# Altium PCB PCB_Aquecedor.PcbDoc
Units mm, origin at the board's own origin, x right, y up, seen from the top; angles counter-clockwise.
Board outline 115 x 87.5 mm, 2 copper layers (Top Layer, Bottom Layer); 32 components, 26 nets, 136 pads, 3 vias.
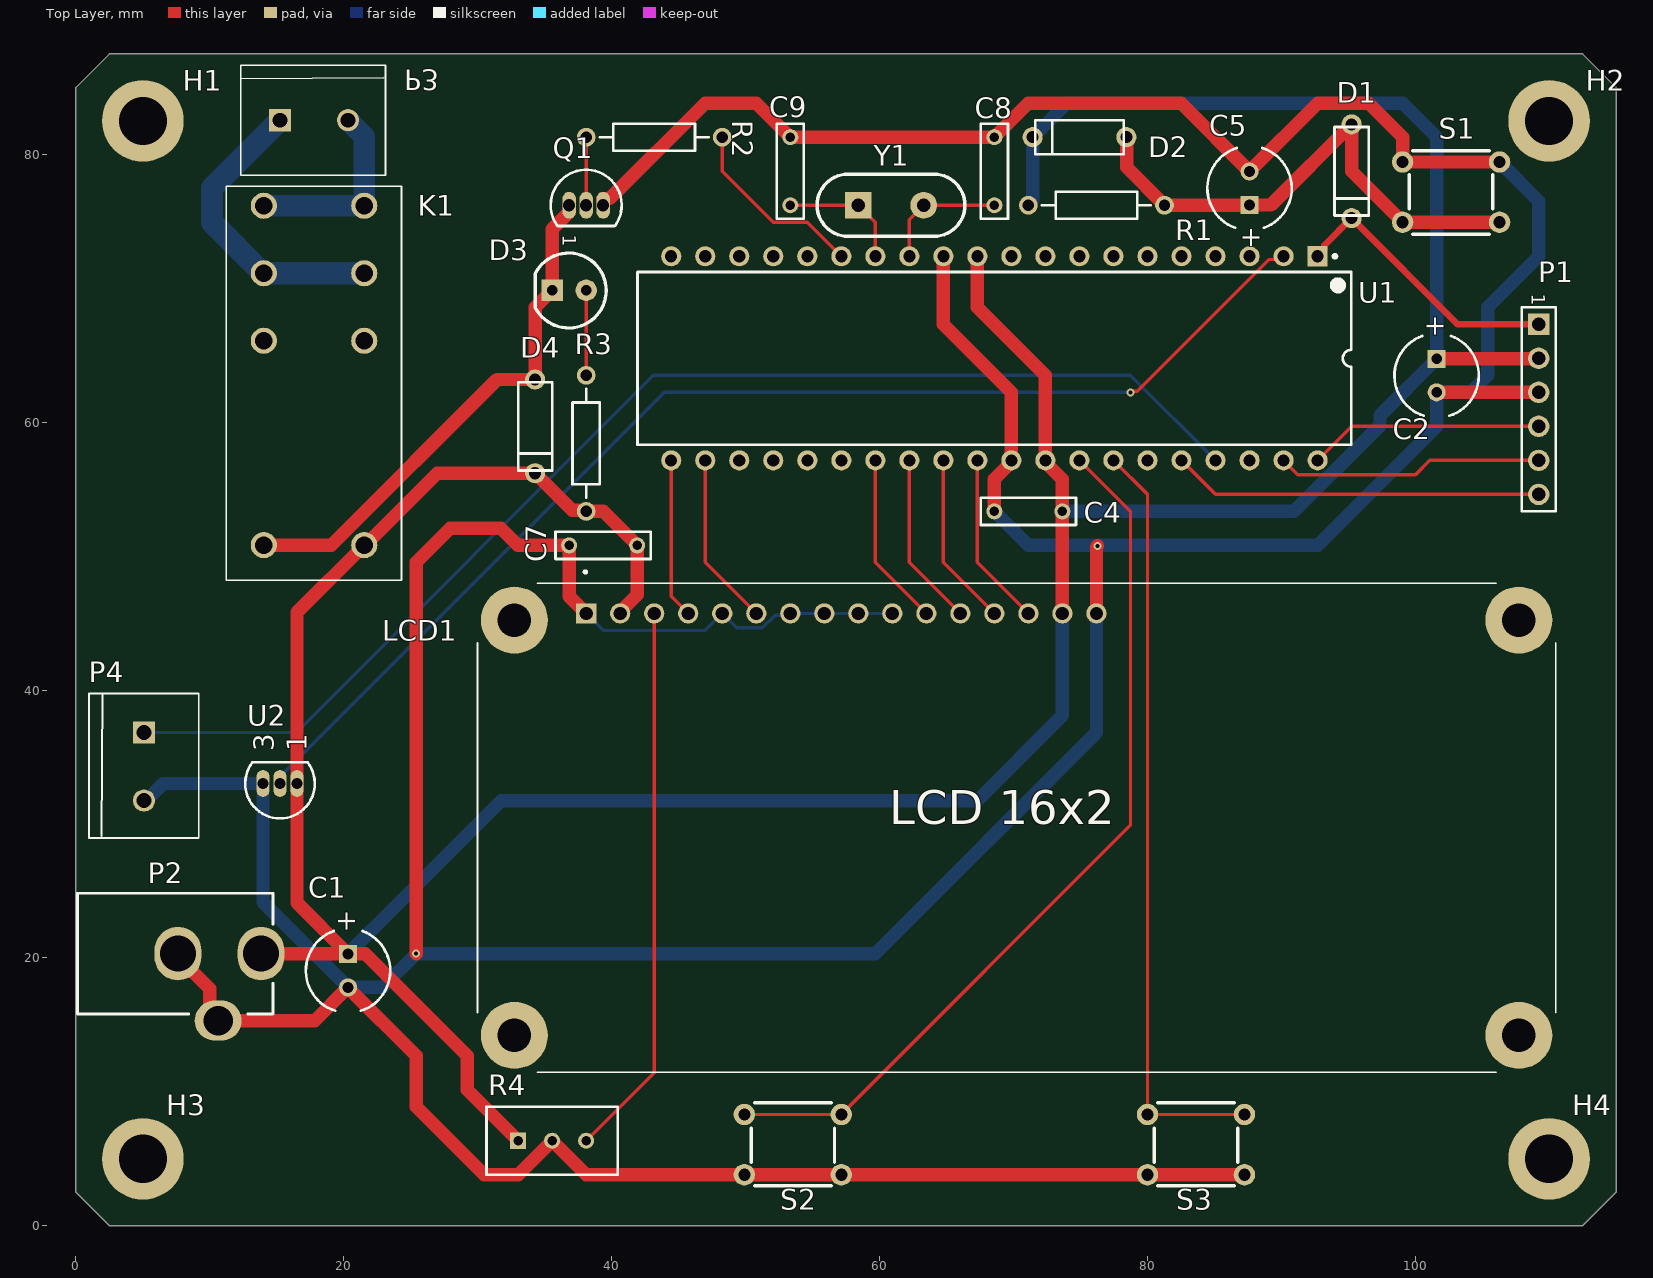
[diagram p0: Top Layer view]
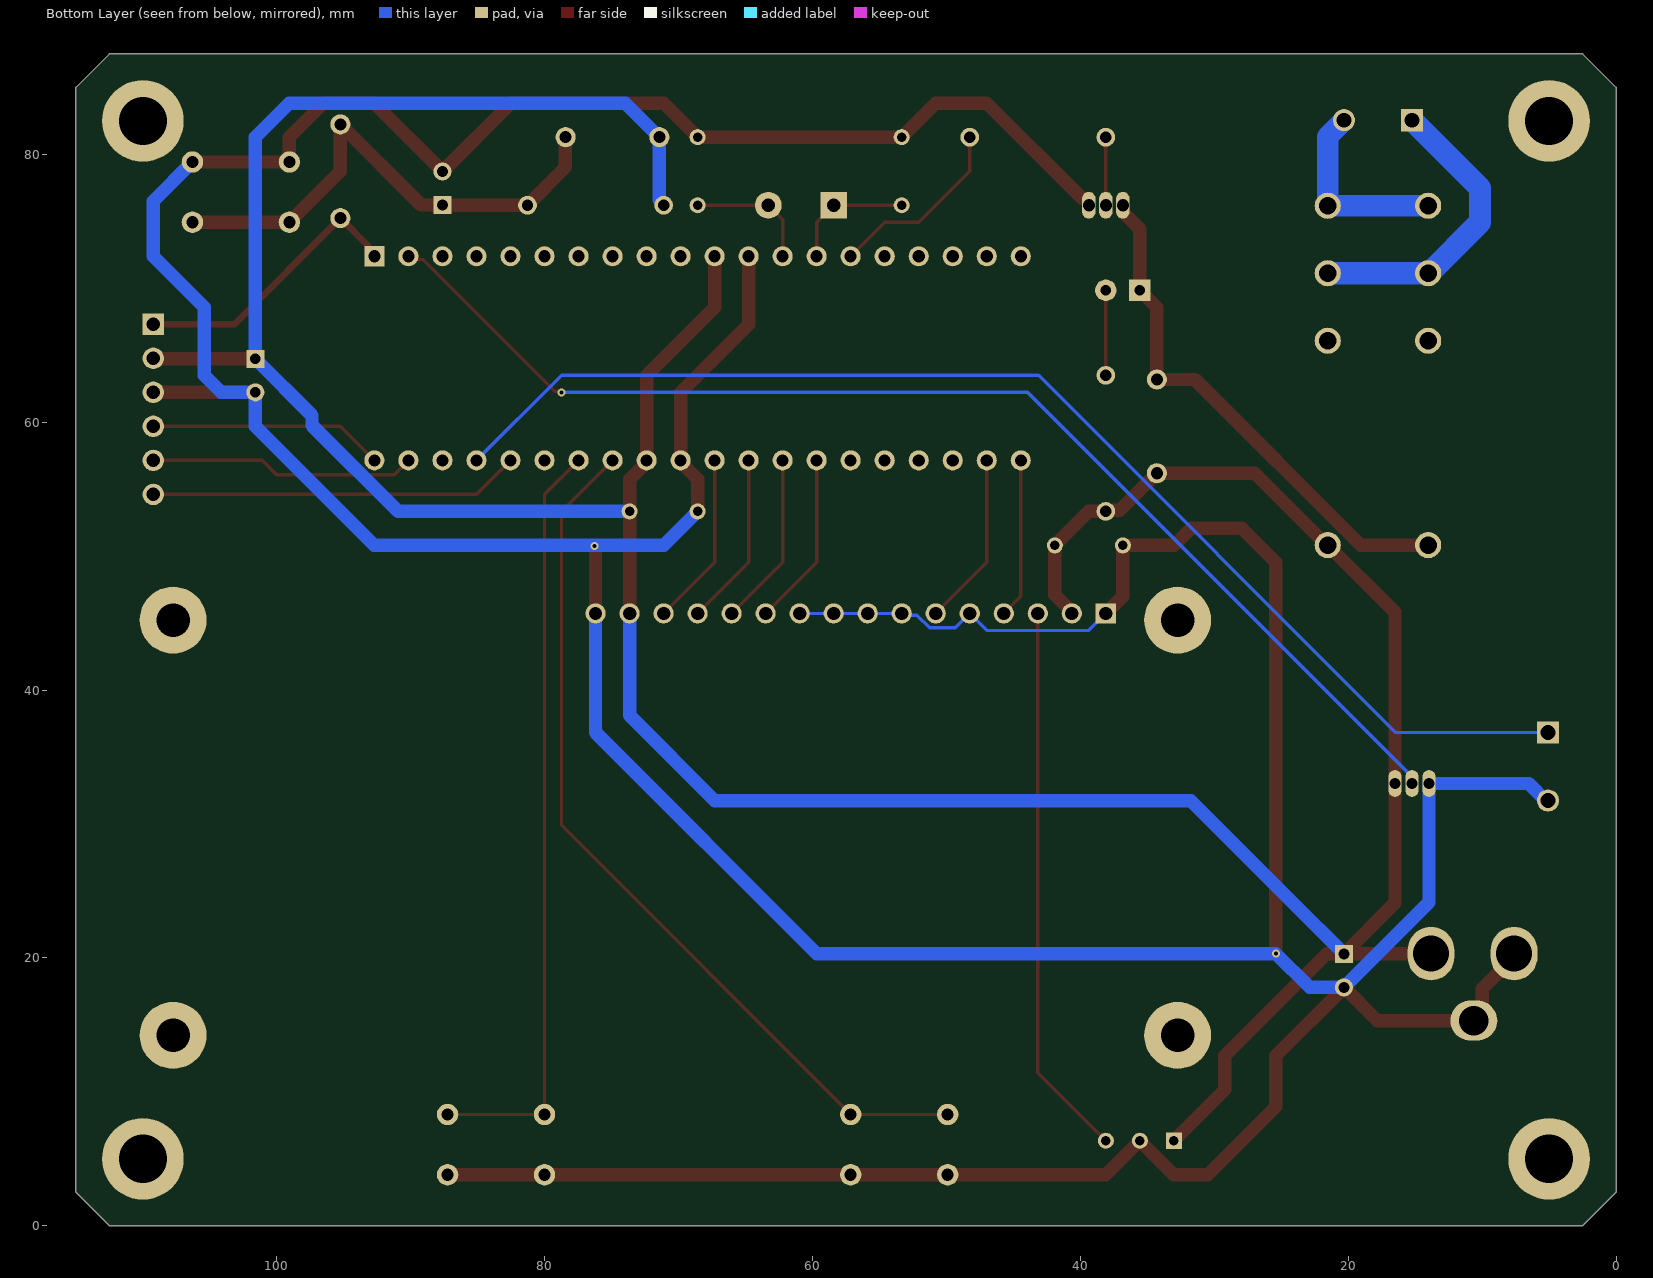
[diagram p1: Bottom Layer view, seen from below]
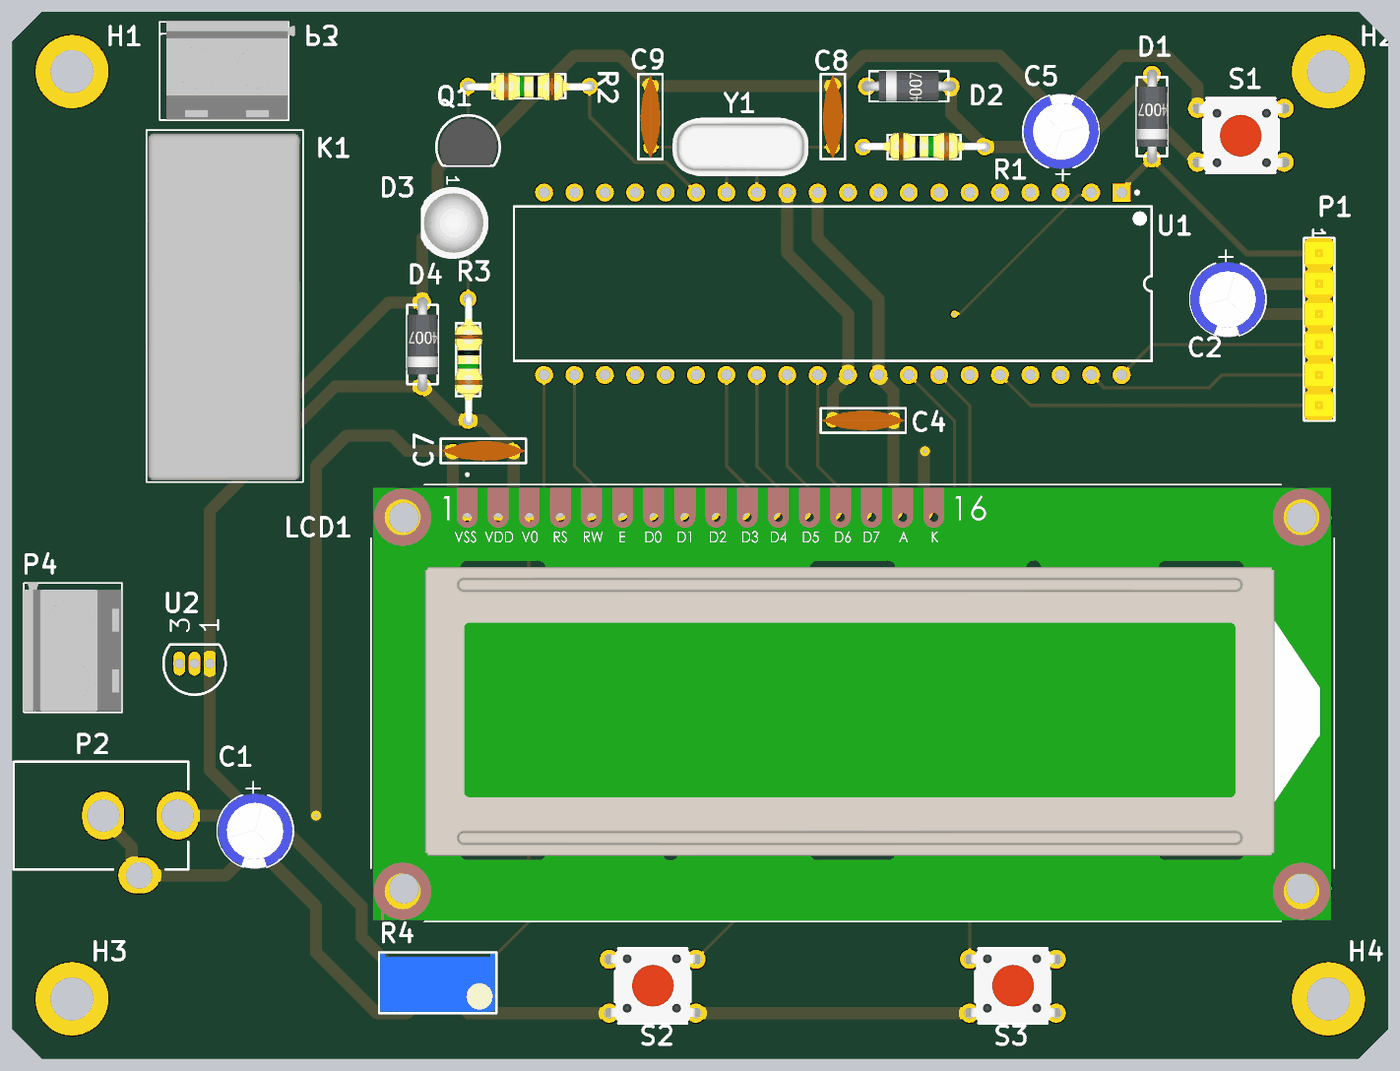
[diagram p2: 3D render of the assembled board from above, using the file's embedded part models]

## Layer stack, top to bottom
Top Solder: solder mask 0.0102, Solder Resist, Dk 3.5
Top Layer: signal copper 0.0356
Dielectric 1: dielectric 0.32, FR-4, Dk 4.8
Bottom Layer: signal copper 0.0356
Bottom Solder: solder mask 0.0102, Solder Resist, Dk 3.5

## Board outline
0,2.5 0,85 2.5,87.5 112.5,87.5 115,85 115,2.5 112.5,0 2.5,0

## Design rules (kind name [scope] priority, off if disabled: settings)
Clearance [All] p1: gap=0.2 ignorepadtopadclearanceinfootprint=FALSE
PolygonConnect [All] p1: connectstyle=Relief reliefconductorwidth=0.254 reliefentries=4 polygonreliefangle="90 Angle" airgapwidth=0.254
RoutingVias [All] p1: holewidth=0.305 width=0.61 viastyle="Through Hole" minholewidth=0.203 minwidth=0.406 maxholewidth=0.508 maxwidth=1.016
SolderMaskExpansion [All] p1: expansion=0.102 istentingtop=FALSE
Width default [InNetClass('other')] p1: maxlimit=0.254 minlimit=0.254 preferedwidth=0.254
Width AC [InNetClass('rele 220AC')] p2: maxlimit=1.7 minlimit=1.6 preferedwidth=1.676
Width power [InNetClass('Power Net')] p3: maxlimit=1 minlimit=0.254 preferedwidth=0.5
30 further rules are at their usual default settings.

## Classes and differential pairs
net class other: BT_AJUSTE BT_SELECT LCD_D4 LCD_D5 LCD_D6 LCD_D7 LCD_E LCD_RS NetC8_2 NetC9_2 NetD3_1 NetLCD1_3 NetQ1_2 NIVEL_CRITICO PGC PGD PGM RELE TMP_SENSOR
net class "rele 220AC": NetK1_1 NetK1_4
net class "Power Net": +5VD \M\C\L\R/VPP GND NetC5_1 NetD3_2
component class Sheet1: C2 C4 C5 C7 C8 C9 D1 D2 P1 P2 P3 P4 R1 R4 S1 S2 S3 Y1

## Components (designator, comment, footprint, x,y, rotation, side; value= is the part's Value field where it differs from the comment)
C1 "10uF 10V" CAPPR5-6.3x11 20.32,19.05 r270 top
C2 "10uF 10V" CAPPR5-6.3x11 101.6,63.48 r270 top
C4 "0.1 uF" RAD-0.2 71.12,53.34 r0 top value=1
C5 "10uF 10V" CAPPR5-6.3x11 87.63,77.47 r90 top
C7 "0.1 uF" RAD-0.2 39.37,50.8 r0 top value=1
C8 "15pF" RAD-0.2 68.58,78.74 r270 top value=1
C9 "15pF" RAD-0.2 53.34,78.74 r270 top value=1
D1 "1n4148" DIODE-1N400X 95.25,78.74 r270 top
D2 "1n4148" DIODE-1N400X 74.93,81.28 r180 top
D3 "LED" LED_5MM_GREEN 38.1,69.85 r180 top
D4 "Diode" DIODE-1N400X 34.29,59.69 r270 top
H1 "Hole" HOLE_M3 5,82.5 r0 top
H2 "Hole" HOLE_M3 110,82.5 r0 top
H3 "Hole" HOLE_M3 5,5 r0 top
H4 "Hole" HOLE_M3 110,5 r0 top
K1 "Relay" RELAY_RTD14005 17.78,63.5 r90 top
LCD1 "LCD 1602A" LCD_RC1602B-BIW-CSV 70.24,29.72 r0 top
P1 "Header 6" HDR1X6m 109.22,67.31 r270 top
P2 "Barrel Jack" BARREL2.5 0.12,20.32 r0 top
P3 "Header 2" "conector rele" 17.78,82.55 r0 top
P4 "Header 2" "conector rele" 5.08,34.29 r270 top
Q1 "bc546ata" TO-92 38.1,76.2 r270 top
R1 "10K" AXIAL-0.4 76.2,76.2 r180 top value=0
R2 "500" AXIAL-0.4 43.18,81.28 r0 top value=0
R3 "300" AXIAL-0.4 38.1,58.42 r90 top value=0
R4 "10k" VR1 35.56,6.35 r0 top
S1 "SW-PB" PB-SW 106.172,74.93 r180 top
S2 "SW-PB" PB-SW 50.038,8.31 r0 top
S3 "SW-PB" PB-SW 80.137,8.31 r0 top
U1 "PIC16F877-04/P" MCHP-PDIP-P40 68.58,64.77 r270 top
U2 "TMP36GT9Z" ADI-T-3 15.24,33.02 r90 top
Y1 "Crystal 4 MHz" CRYSTAL-HC49S 58.42,76.2 r90 top

## Footprints (in the part's own frame and the unit in brackets; to place one, negate y for a bottom-side part, rotate by r counter-clockwise, add the part's x,y. Pads: shape width x height; smd on the part's side, far side on the other; paste and mask are expansions set on the pad)
ADI-T-3 [mm] "TO, Flat Index; 3 In-Line, Axial Leads; Body Dia. 5.1mm; Leads 0.48 x 0.48 mm (max)"
  oval 2x1 hole 0.8: 1(0,-1.27) 2(0,0) 3(0,1.27)
  silkscreen extent -2.6,-2.6 1.6,2.6, body extent -2.6,-2.61 1.6,2.61, height 5.33
AXIAL-0.4 [mm]
  round 1.4 hole 0.85: 1(-5.08,0) 2(5.08,0)
  silkscreen extent -4.06,-1.02 4.06,1.02, body extent -5.38,-1.2 5.38,1.11, height 2.85
BARREL2.5 [mm] "DC Power Jack, 2.5mm, KLD Series, PCB Mount"
  oval 3.5x4 hole 2.7: 1(13.7,0) 2(7.5,0)
  oval 3.5x3 hole 2.2: 3(10.5,-5)
  silkscreen extent 0,-4.5 14.6,4.5, body extent 0,-4.45 14.54,4.56, height 11
CAPPR5-6.3x11 [mm] "Capacitor, Electrolytic, Radial; Body 6.3 x 11 mm (Dia.xH typ)"
  rect 1.35x1.35 hole 0.8: 1(-1.25,0)
  round 1.35 hole 0.8: 2(1.25,0)
  silkscreen extent -2.96,-3.15 3,3.15, body extent -3.12,-3.17 3.17,3.12, height 11.2
"conector rele" [mm]
  rect 1.65x1.65 hole 1.1: 1(-2.54,0)
  round 1.65 hole 1.1: 2(2.54,0)
  silkscreen extent -5.46,-4.1 5.33,4.1, body extent -4.91,-4.06 5.85,4.14, height 10
CRYSTAL-HC49S [mm]
  rect 2x2 hole 1: 1(0,0)
  round 2 hole 1: 2(0,-4.88)
  silkscreen extent -2.32,-7.96 2.32,3.08, body extent -2.34,-8.12 2.31,3.23, height 3.52
DIODE-1N400X [mm]
  round 1.5 hole 0.9: 1(-3.5,0) 2(3.5,0)
  silkscreen extent -3.3,-1.27 3.3,1.27, body extent -3.9,-1.31 3.9,1.31, height 2.81
HDR1X6m [mm] "Connector; Header; 6 Position"
  rect 1.6x1.6 hole 1: 1(0,0)
  round 1.6 hole 1: 2(2.54,0) 3(5.08,0) 4(7.62,0) 5(10.16,0) 6(12.7,0)
  silkscreen extent -1.27,-1.27 13.97,1.27, body extent -1.27,-1.27 13.97,1.27, height 9.55
HOLE_M3 [mm]
  round 6.1 hole 3.6: 1(0,0)
LCD_RC1602B-BIW-CSV [mm]
  rect 1.508x1.508 hole 1: 1(-32.14,16)
  round 1.508 hole 1: 2(-29.6,16) 3(-27.06,16) 4(-24.52,16) 5(-21.98,16) 6(-19.44,16) 7(-16.9,16) 8(-14.36,16) 9(-11.82,16) 10(-9.28,16) 11(-6.74,16) 12(-4.2,16) 13(-1.66,16) 14(0.88,16) 15(3.42,16) 16(5.96,16)
  round 5 hole 2.5: S1(-37.5,15.5) S2(37.5,15.5) S3(37.5,-15.5) S4(-37.5,-15.5)
  silkscreen extent -40.25,-18.25 40.25,19.2, body extent -40.06,-18.18 39.96,17.98, height 11.4
LED_5MM_GREEN [mm] "Led 5 mm"
  round 1.6 hole 0.8: 1(0,0)
  rect 1.6x1.6 hole 0.8: 2(2.54,0)
  silkscreen extent -1.49,-2.78 3.81,2.82, body extent -1.71,-3.01 3.71,3.01, height 8.81
MCHP-PDIP-P40 [mm] "PDIP, 40-Leads, Body 51.75x13.53mm, Pitch 2.54mm"
  rect 1.5x1.5 hole 0.9: 1(-7.62,24.13)
  round 1.5 hole 0.9: 2(-7.62,21.59) 3(-7.62,19.05) 4(-7.62,16.51) 5(-7.62,13.97) 6(-7.62,11.43) 7(-7.62,8.89) 8(-7.62,6.35) 9(-7.62,3.81) 10(-7.62,1.27) 11(-7.62,-1.27) 12(-7.62,-3.81) 13(-7.62,-6.35) 14(-7.62,-8.89) 15(-7.62,-11.43) 16(-7.62,-13.97) 17(-7.62,-16.51) 18(-7.62,-19.05) 19(-7.62,-21.59) 20(-7.62,-24.13) 21(7.62,-24.13) 22(7.62,-21.59) 23(7.62,-19.05) 24(7.62,-16.51) 25(7.62,-13.97) 26(7.62,-11.43) 27(7.62,-8.89) 28(7.62,-6.35) 29(7.62,-3.81) 30(7.62,-1.27) 31(7.62,1.27) 32(7.62,3.81) 33(7.62,6.35) 34(7.62,8.89) 35(7.62,11.43) 36(7.62,13.97) 37(7.62,16.51) 38(7.62,19.05) 39(7.62,21.59) 40(7.62,24.13)
  silkscreen extent -7.74,-26.65 6.45,26.65, body extent -7.76,-26.6 7.76,26.6, height 6.35
PB-SW [mm]
  round 1.6 hole 0.9: 1(-0.127,0) 1(7.112,0) 2(-0.127,-4.5) 2(7.112,-4.5)
  silkscreen extent 0.38,-5.33 6.6,0.89, body extent -0.44,-5.31 7.46,0.89, height 7.1
RAD-0.2 [mm]
  round 1.2 hole 0.7: 1(-2.54,0) 2(2.54,0)
  silkscreen extent -3.56,-1.02 3.56,1.02, body extent -3.5,-0.85 3.5,0.85, height 7.31
RELAY_RTD14005 [mm]
  round 1.95 hole 1.3: 1(7.62,-3.75) 1(7.62,3.75) 2(2.58,3.75) 2(2.58,-3.75) 4(12.66,-3.75) 4(12.66,3.75) A1(-12.68,-3.75) A2(-12.68,3.75)
  silkscreen extent -15.29,-6.53 14.12,6.55, body extent -15.16,-6.27 13.84,6.43, height 15.7
TO-92 [mm] "TO, Flat Index; 3 In-Line, Axial Leads; Body Dia. 4.8mm; Leads 0.48 x 0.51 mm (max)"
  oval 2x1 hole 0.9: 1(0,-1.27) 2(0,0) 3(0,1.27)
  silkscreen extent -2.65,-2.65 1.55,2.65, body extent -2.4,-2.4 1.53,2.4, height 6
VR1 [mm]
  rect 1.2x1.2 hole 0.7: 1(-2.54,0)
  round 1.2 hole 0.7: 2(0,0) 3(2.54,0)
  silkscreen extent -4.9,-2.54 4.9,2.54, body extent -4.76,-2.41 4.77,2.42, height 11.6

## Part data
C1 C2 C5: library part CP, "Radial-ECAP", Capacitance=10uF, Case/Package=Radial, Manufacturer Part Number=10MS510MEFC4X5, Max Operating Temperature=85°C, Min Operating Temperature=-40°C, Package Quantity=5000, Ripple Current=16mA, Supplier Part Number 1=1189-4041-ND, Tolerance=20%, Voltage Rating=10V, Category="Aluminum Electrolytic Capacitors", ComponentLink1Description=https://datasheet.ciiva.com/6318/e-ms5-6318997.pdf?src-supplier=Digi-Key, ComponentLink1URL=https://datasheet.ciiva.com/6318/e-ms5-6318997.pdf?src-supplier=Digi-Key, Diameter=4mm, Height=5mm, Height - Seated (Max)=0.256inch, Lead Pitch=0.059inch, Life (Hours)=1000Hour, Mount="Through Hole", Packaging=Bulk, Pricing 1="1=0,26000, 10=0,17700, 50=0,11780, 100=0,10010, 500=0,07066, 1000=0,06182, 2500=0,05888, 5000=0,05446 (USD)", RoHS=Yes, RoHS Compliant=Yes, Series=MS5, Stock 1=926, Supplier 1=Digi-Key, Voltage Rating (DC)=10V
C4 C7: library part C, "CAP CER 100PF 100V C0G/NP0 RAD", Capacitance=100pF, Case/Package=Radial, Dielectric=C0G, Manufacturer Part Number=RCE5C2A101J0M1H03A, Max Operating Temperature=125°C, Min Operating Temperature=-55°C, Package Quantity=2000, Ratings=AEC-Q200, Resistor Type=Ceramic, Supplier Part Number 1=490-7421-1-ND, Tolerance=5%, Voltage Rating=100V, Category="Ceramic Capacitors", ComponentLink1Description=https://datasheet.ciiva.com/18699/cnrpee-18699766.pdf?src-supplier=Digi-Key, ComponentLink1URL=https://datasheet.ciiva.com/18699/cnrpee-18699766.pdf?src-supplier=Digi-Key, ComponentLink2Description=https://datasheet.ciiva.com/18699/cnrpee-18699767.pdf?src-supplier=Digi-Key, ComponentLink2URL=https://datasheet.ciiva.com/18699/cnrpee-18699767.pdf?src-supplier=Digi-Key, Height=3.5mm, Height - Seated (Max)=0.138inch, Lead Diameter=0.5mm, Lead Pitch=0.197inch, Lead/Base Style="Formed Leads", Length=0.142inch, Mount="Through Hole", Packaging="Tape and Reel", Pricing 1="1=0,53000, 10=0,37300, 50=0,28200, 100=0,24560, 500=0,18194, 1000=0,15465 (USD)", RoHS=Yes, RoHS Compliant=Yes, Stock 1=2206, Supplier 1=Digi-Key, Termination=Radial, Voltage Rating (DC)=100V, Width=0.098inch
C8 C9: library part C, "Ceramic Capacitor, Multilayer, Ceramic, 50V, 5% +Tol, 5% -Tol, C0G, 30ppm/Cel TC, 0.000015uF, Through Hole Mount", Case/Package=Dipped, Dielectric=C0G, Dielectric Material=Ceramic, Manufacturer Part Number=K150J15C0GF5TL2, Max Operating Temperature=125°C, Min Operating Temperature=-55°C, Package Quantity=4000, Supplier Part Number 1=BC1003CT-ND, Tolerance=5%, Voltage Rating=50V, Capacitance=15pF, Category="Ceramic Capacitors", ComponentLink1Description=https://datasheet.ciiva.com/145/kseries-145757.pdf?src-supplier=Digi-Key, ComponentLink1URL=https://datasheet.ciiva.com/145/kseries-145757.pdf?src-supplier=Digi-Key, ComponentLink2Description=https://datasheet.ciiva.com/145/kseries-145756.pdf?src-supplier=Digi-Key, ComponentLink2URL=https://datasheet.ciiva.com/145/kseries-145756.pdf?src-supplier=Digi-Key, ComponentLink3Description=https://datasheet.ciiva.com/46394/1756139-46394535.pdf?src-supplier=Element14, ComponentLink3URL=https://datasheet.ciiva.com/46394/1756139-46394535.pdf?src-supplier=Element14, ComponentLink4Description=https://datasheet.ciiva.com/16458/kseries-16458760.pdf?src-supplier=Future+Electronics, ComponentLink4URL=https://datasheet.ciiva.com/16458/kseries-16458760.pdf?src-supplier=Future+Electronics, ComponentLink5Description=https://datasheet.ciiva.com/7974/1682830-7974813.pdf?src-supplier=Element14, ComponentLink5URL=https://datasheet.ciiva.com/7974/1682830-7974813.pdf?src-supplier=Element14, Construction=RADIAL, Depth=2.6mm, Height - Seated (Max)=0.22inch, Lead Free="Lead Free", Lead Length=30mm, Lead Pitch=2.5mm, Lead/Base Style=Straight, Length=0.157inch, Mount="Through Hole", Number of Pins=2, Packaging="Tape and Reel", Pricing 1="1=0,26000, 10=0,17500, 50=0,10500, 100=0,08860, 500=0,06064, 1000=0,05364 (USD)", Radiation Hardening=No, REACH SVHC=Unknown, RoHS=Yes, RoHS Compliant=Yes, Series="Mono-Kap™ K", Stock 1=7836, Supplier 1=Digi-Key, Termination=Radial, Voltage Rating (DC)=50V, Width=0.098inch
D1 D2: library part D, "Diode"
D4: library part D
K1: "Single-Pole Dual-Throw Relay"
LCD1: "Display: LCD; alphanumeric; STN Negative; 16x2; blue; LED; PIN: 16", Package=None, Availability=Unavailable, MF=Raystar, MP=RC1602B-BIW-CSV, Price=None, SnapEDA_Link=https://www.snapeda.com/parts/RC1602B-BIW-CSV/Raystar/view-part/581171/?ref=snap
P1: "Header, 6-Pin", LatestRevisionDate=17-Jul-2002, LatestRevisionNote="Re-released for DXP Platform.", Publisher="Altium Limited"
P2: library part PWR2.5, "Low Voltage Power Supply Connector", Manufacturer="Memory Protection Devices", Manufacturer Part Number=EJ503A, Supplier Part Number 1=EJ503A-ND, Pricing 1="1=2.7, 10=2.447, 100=2.0977, 500=1.74806, 1000=1.49834 (USD)", Stock 1=1084, Supplier 1=Digi-Key
Q1: library part NPN, "Trans GP BJT NPN 65V 0.1A 3-Pin TO-92 Ammo", Case/Package=TO-92-3, Collector Base Voltage (VCBO)=80V, Collector Emitter Breakdown Voltage=65V, Collector Emitter Saturation Voltage=250mV, Collector-emitter Voltage-Max=600mV, Current Rating=100mA, Emitter Base Voltage (VEBO)=6V, Frequency=300MHz, Manufacturer Part Number=BC546ATA, Max Operating Temperature=150°C, Max Power Dissipation=500mW, Min Operating Temperature=-65°C, Package Quantity=2000, Supplier Part Number 1=BC546ATAFSCT-ND, Category=BJTs, Collector Emitter Voltage (VCEO)=65V, ComponentLink1Description=https://datasheet.ciiva.com/11205/bc550-11205919.pdf?src-supplier=Avnet, ComponentLink1URL=https://datasheet.ciiva.com/11205/bc550-11205919.pdf?src-supplier=Avnet, ComponentLink2Description=https://datasheet.ciiva.com/4722/bc546-4722077.pdf?src-supplier=Mouser, ComponentLink2URL=https://datasheet.ciiva.com/4722/bc546-4722077.pdf?src-supplier=Mouser, ComponentLink3Description=https://datasheet.ciiva.com/46415/1868820-46415432.pdf?src-supplier=Element14, ComponentLink3URL=https://datasheet.ciiva.com/46415/1868820-46415432.pdf?src-supplier=Element14, ComponentLink4Description=https://datasheet.ciiva.com/25996/bc550-25996601.pdf?src-supplier=Avnet+Europe, ComponentLink4URL=https://datasheet.ciiva.com/25996/bc550-25996601.pdf?src-supplier=Avnet+Europe, Contact Plating=Tin,Matte, Element Configuration=Single, Gain Bandwidth Product=300MHz, Height=4.58mm, hFE Min=110, Lead Free="Lead Free", Length=4.58mm, Max Breakdown Voltage=65V, Max Collector Current=100mA, Max Frequency=300MHz, Mount="Through Hole", Number of Elements=1, Number of Pins=3, Packaging="Ammo Pack", Polarity=NPN, Power Dissipation=500mW, Pricing 1="1=0,30000, 10=0,25000, 25=0,20880, 100=0,13230, 500=0,08706, 1000=0,05920 (USD)", REACH SVHC="No SVHC", RoHS=Yes, Series=-, Supplier 1=Digi-Key, Transition Frequency=300MHz, Voltage Rating (DC)=65V, Weight=0.24g, Width=3.86mm
R1 R2 R3: library part R, "Res Carbon Film 10K Ohm 5% 1/6W -500ppm/°C to 350ppm/°C Conformal AXL Thru-Hole Ammo Pack", Case/Package=Conformal, Manufacturer Part Number=CFR-12JT-52-10K, Max Operating Temperature=155°C, Min Operating Temperature=-55°C, Power Rating=167mW, Resistance=10kR, Resistor Type="Carbon Film", Supplier Part Number 1=13-CFR-12JT-52-10KCT-ND, Temperature Coefficient=350ppm/°C, Tolerance=5%, Category="Through-Hole Resistors", ComponentLink1Description=http://components.arrow.com/part/dataview/0323_03325961?src-supplier=Arrow+Europe, ComponentLink1URL=http://components.arrow.com/part/dataview/0323_03325961?src-supplier=Arrow+Europe, ComponentLink2Description=http://www.yageo.com/documents/recent/Yageo%20LR_CFR_2013.pdf?src-supplier=Avnet, ComponentLink2URL=http://www.yageo.com/documents/recent/Yageo%20LR_CFR_2013.pdf?src-supplier=Avnet, ComponentLink3Description=http://www.yageo.com/documents/recent/Leaded-R_CFR_2011.pdf?src-supplier=Avnet+Europe, ComponentLink3URL=http://www.yageo.com/documents/recent/Leaded-R_CFR_2011.pdf?src-supplier=Avnet+Europe, ComponentLink4Description=http://www.yageo.com/documents/recent/General%20Type_CFR.pdf?src-supplier=Future+Electronics, ComponentLink4URL=http://www.yageo.com/documents/recent/General%20Type_CFR.pdf?src-supplier=Future+Electronics, ComponentLink5Description=http://datasheet.octopart.com/CFR-12JT52-10K-Yageo-datasheet-12509909.pdf?src-supplier=_legacy+Avnet, ComponentLink5URL=http://datasheet.octopart.com/CFR-12JT52-10K-Yageo-datasheet-12509909.pdf?src-supplier=_legacy+Avnet, ComponentLink6Description=http://datasheet.octopart.com/CFR-12JT52-10K-Yageo-datasheet-28066625.pdf?src-supplier=Megastar, ComponentLink6URL=http://datasheet.octopart.com/CFR-12JT52-10K-Yageo-datasheet-28066625.pdf?src-supplier=Megastar, ComponentLink7Description=http://datasheet.octopart.com/CFR-12JT52-10K-Yageo-datasheet-118566.pdf?src-supplier=Future+Electronics, ComponentLink7URL=http://datasheet.octopart.com/CFR-12JT52-10K-Yageo-datasheet-118566.pdf?src-supplier=Future+Electronics, ComponentLink8Description=http://datasheet.octopart.com/CFR-12JT52-10K-Yageo-datasheet-17276704.pdf?src-supplier=Future+Electronics, ComponentLink8URL=http://datasheet.octopart.com/CFR-12JT52-10K-Yageo-datasheet-17276704.pdf?src-supplier=Future+Electronics, ComponentLink9Description=http://datasheet.octopart.com/CFR-12JT52-10K-Yageo-datasheet-137875058.pdf?src-supplier=Future+Electronics, ComponentLink9URL=http://datasheet.octopart.com/CFR-12JT52-10K-Yageo-datasheet-137875058.pdf?src-supplier=Future+Electronics, Construction=Cylindrical, Contact Plating=Tin, Diameter=1.9mm, Lead Free="Lead Free", Length=3.4mm, Military Standard=Not, Mount="Through Hole", Pricing 1="1=0,10000, 10=0,07400, 25=0,05120, 50=0,03980, 100=0,02840, 250=0,02216, 500=0,01760, 1000=0,01250 (USD)", Radiation Hardening=No, RoHS Compliant=Yes, Supplier 1=Digi-Key, Termination=Axial
R4: library part "R Pot", "TRIMMER 10K OHM 0.5W PC PIN", Manufacturer Part Number=3296W-1-103ALF, Max Operating Temperature=125°C, Max Power Dissipation=500mW, Min Operating Temperature=-55°C, Package Quantity=1000, Resistance=10kR, Resistor Type=Cermet, Supplier Part Number 1=3296W-1-103ALF-ND, Temperature Coefficient=100ppm/°C, Tolerance=10%, Category="Variable Resistors and Potentiometers", ComponentLink1Description=https://datasheet.ciiva.com/2162/3296-2162754.pdf?src-supplier=Digi-Key, ComponentLink1URL=https://datasheet.ciiva.com/2162/3296-2162754.pdf?src-supplier=Digi-Key, Contact Plating=Tin,Matte, Depth=4.83mm, Height=0.395inch, Length=9.53mm, Military Standard=Not, Mount="Through Hole,PCB", Number of Turns=25, Packaging="Ammo Pack", Power Rating=500mW, Pricing 1="1000=1,81350 (USD)", RoHS=Yes, RoHS Compliant=Yes, Series="Trimpot® 3296 - Sealed", Supplier 1=Digi-Key, Taper=Linear, Technology=CERMET, Termination=Pin, Type=Potentiometer, Weight=0.03oz, Width=0.19inch
S1 S2 S3: library part "SW Tact", "Tactile Switches 6mm square tact", Actuator Color=Black, Contact Resistance=100mR, Current Rating=50mA, Manufacturer Part Number=MJTP1230A, Max Operating Temperature=70°C, Max Voltage Rating (DC)=12V, Min Operating Temperature=-20°C, Operating Force=160gf, Package Quantity=100, Supplier Part Number 1=679-2429-ND, Actuator Length=1.4mm, Actuator Material=Thermoplastic, Actuator Type=Standard, Category="Tactile Switches", Color=Black, ComponentLink1Description=https://datasheet.ciiva.com/16155/mjtp-6mm-16155870.pdf?src-supplier=Onlinecomponents.com, ComponentLink1URL=https://datasheet.ciiva.com/16155/mjtp-6mm-16155870.pdf?src-supplier=Onlinecomponents.com, Contact Material="Bronze,Stainless Steel", Contact Plating=Silver, Electrical Life=100000Cycles, Illumination Type=Non-Illuminated,Illuminated, Mechanical Life=100000Cycles, Mount="Through Hole", Orientation=Straight, Packaging=Bulk, Pricing 1="1=0,22000, 10=0,20800, 25=0,19720, 100=0,17860, 250=0,16280, 500=0,15130, 1000=0,12908, 2500=0,12549, 5000=0,11832 (USD)", REACH SVHC="No SVHC", RoHS=Yes, RoHS Compliant=Yes, Series=MJTP, Stock 1=19622, Supplier 1=Digi-Key, Switch Function=Off-Mom, Switch Travel=0.25mm, Termination="PC Pin", Throw Configuration=SPST, Voltage Rating (DC)=12V
U1: "8-bit Microcontrollers - MCU 14KB 368 RAM 33 I/O", Case/Package=PDIP, Frequency=20MHz, Manufacturer=Microchip, Manufacturer Part Number=PIC16F877A-I/P, Max Operating Temperature=85°C, Max Supply Voltage=5.5V, Min Operating Temperature=-40°C, Min Supply Voltage=4V, Nominal Supply Current=1.6mA, Operation Voltage Range="2V - 5.5V", Package Quantity=10, Supplier Part Number 1=PIC16F877-04/P-ND, # of A/D Channels=8, Access Time=20us, Address Bus Width=8b, Category=Microcontrollers, ComponentLink1Description=Datasheet, ComponentLink1URL=http://ww1.microchip.com/downloads/en/DeviceDoc/30292D.pdf, ComponentLink2Description="Package Specification", ComponentLink2URL=http://www.microchip.com/stellent/groups/techpub_sg/documents/packagingspec/en012702.pdf, ComponentLink3Description="URL Link1", ComponentLink3URL="Product URL:http://www.microchip.com/datasheet/PIC16F877", ComponentLink4Description=https://datasheet.ciiva.com/20167/73-3352-20167940.pdf?src-supplier=Rapid+Electronics, ComponentLink4URL=https://datasheet.ciiva.com/20167/73-3352-20167940.pdf?src-supplier=Rapid+Electronics, ComponentLink5Description=https://datasheet.ciiva.com/26815/pic16f877a-i-p-26815829.pdf?src-supplier=IIIC, ComponentLink5URL=https://datasheet.ciiva.com/26815/pic16f877a-i-p-26815829.pdf?src-supplier=IIIC, ComponentLink6Description=https://datasheet.ciiva.com/3203/39582b-3203499.pdf?src-supplier=Avnet, ComponentLink6URL=https://datasheet.ciiva.com/3203/39582b-3203499.pdf?src-supplier=Avnet, ComponentLink7Description=https://datasheet.ciiva.com/7774/1693496-7774278.pdf?src-supplier=Element14, ComponentLink7URL=https://datasheet.ciiva.com/7774/1693496-7774278.pdf?src-supplier=Element14, ComponentLink8Description=https://datasheet.ciiva.com/7774/39582b-7774279.pdf?src-supplier=Element14, ComponentLink8URL=https://datasheet.ciiva.com/7774/39582b-7774279.pdf?src-supplier=Element14, ComponentLink9Description=https://datasheet.ciiva.com/16478/filehandler-aspxddocname-en011789-16478671.pdf?src-supplier=Future+Electronics, ComponentLink9URL=https://datasheet.ciiva.com/16478/filehandler-aspxddocname-en011789-16478671.pdf?src-supplier=Future+Electronics, ComponentLink10Description=https://datasheet.ciiva.com/17383/39582b-17383214.pdf?src-supplier=Avnet+Europe, ComponentLink10URL=https://datasheet.ciiva.com/17383/39582b-17383214.pdf?src-supplier=Avnet+Europe, ComponentLink11Description=https://datasheet.ciiva.com/14131/capic16f87x-e-14131995.pdf?src-supplier=Distrelec, ComponentLink11URL=https://datasheet.ciiva.com/14131/capic16f87x-e-14131995.pdf?src-supplier=Distrelec, ComponentLink12Description=https://datasheet.ciiva.com/18404/70045630-18404427.pdf?src-supplier=Allied+Electronics, ComponentLink12URL=https://datasheet.ciiva.com/18404/70045630-18404427.pdf?src-supplier=Allied+Electronics, ComponentLink13Description=https://datasheet.ciiva.com/29331/165144-da-01-de-pic16f877a-i-p-29331836.pdf?src-supplier=Conrad, ComponentLink13URL=https://datasheet.ciiva.com/29331/165144-da-01-de-pic16f877a-i-p-29331836.pdf?src-supplier=Conrad, Core Architecture=PIC, Data Bus Width=8b, DatasheetVersion="Rev. D", Density=14KB, Digital Communication="0 -UART, 1 -A/E/USART, 0 -SPI, 0 -I2C, 1 -MSSP(SPI/I2C)", EEPROM Data Memory (bytes)=256, Height=4.06mm, Interface=I2C,SPI,UART,USART,SSP, Lead Free="Lead Free", Length=52.45mm, Max Frequency=20MHz, Max. CPU Speed MHz=4, Memory Size=14KB, Memory Type=Flash, Mount="Through Hole", Mounting Technology="Through Hole", Number of ADC Channels=8, Number of Bits=8, Number of I2C Channels=1, Number of I/Os=33, Number of Pins=40, Number of Programmable I/O=33, Number of PWM Channels=2, Number of SPI Channels=1, Number of Timers/Counters=3, Oscillator Type=External, PackageDescription="40-Lead Plastic Dual In-Line Package, Body 51.75 x 13.53 mm, Pitch 2.54 mm", PackageReference=PDIP-P40, PackageVersion="C04-016B, 04/2013", Packaging=Rail/Tube, Packing=TUBE, PartNumber=PIC16F877-04/P, Peripherals="Brown-out Detect/Reset,POR,PWM,WDT,I2C", Pricing 6="1=6,60000 (USD)", Program Memory KBytes=14, Program Memory KWords=8, Radiation Hardening=No, RAM=368, RAM Size=368B, REACH SVHC="No SVHC", RoHS=TRUE, Stock 6=1089, Supplier 1=Digi-Key, Supplier 2=Farnell, Supplier 3=Farnell, Supplier 4=Newark, Supplier 5=Mouser, Supplier 6=Digi-Key, Supplier Part Number 2=1523963, Supplier Part Number 3=9761349, Supplier Part Number 4=61K3463, Supplier Part Number 5=579-PIC16F87704P, Supplier Part Number 6=PIC16F877A-I/P-ND, Supply Current=1.6mA, Timers="2 - 8-bit, 1 - 16-bit", Watchdog Timer=Yes, Width=14.22mm
U2: "Low Voltage Temperature Sensor, 2.7 to 5.5 V Supply, Industrial, 3-pin TO92 (T-3), Tray", Manufacturer="Analog Devices", Supplier Part Number 1=TMP36GT9Z-ND, Supply Voltage Range="2.7 to 5.5 V", Code_JEDEC=TO-226-AA, ComponentLink1Description="Manufacturer URL", ComponentLink1URL=http://www.analog.com/en/index.html, ComponentLink2Description=Datasheet, ComponentLink2URL=http://www.analog.com/static/imported-files/data_sheets/TMP35_36_37.pdf, ComponentLink3Description="Package Specification", ComponentLink3URL=http://www.analog.com/static/imported-files/packages/PKG_PDF/TO-92(T)/T_3.pdf, ComponentLink4Description="Product URL", ComponentLink4URL=http://www.analog.com/en/mems-sensors/digital-temperature-sensors/tmp36/products/product.html, DatasheetVersion="Rev. F", Mounting Technology="Through Hole", PackageDescription="3-Pin Plastic Header-Style Package, 1.27 mm Pitch", PackageReference=T-3, PackageVersion="042208-A, 04/2008", Packing=Tray, PartNumber=TMP36GT9Z, Supplier 1=Digi-Key, Supplier 2=Farnell, Supplier 3=Newark, Supplier 4=Mouser, Supplier Part Number 2=1438760, Supplier Part Number 3=19M9015, Supplier Part Number 4=584-TMP36GT9Z
Y1: library part XTAL, "Crystal Oscillator", Manufacturer Part Number=HC49US-FF3F18-4.000MHZ, Supplier Part Number 1=2780-HC49US-FF3F18-4.000MHZ-ND, Pricing 1="1=0,33000, 10=0,27500, 50=0,24760, 100=0,22000, 500=0,20900, 1000=0,17600, 2500=0,16500, 5000=0,15950, 10000=0,15400 (USD)", RoHS=No, Stock 1=930, Supplier 1=Digi-Key

## Via types
v1: diameter 0.61, hole 0.305, Top Layer to Bottom Layer, 3 vias

## Nets (pads, with @x,y where several pads share a name; then routed paths per layer and width w, separated by ;. In a path a pad name is that pad's centre, name@x,y a point inside that pad or via, vN(x,y) a via of type N, cw(c..) or ccw(c..) an arc to the next point about the centre after c; other vN are vias at no path point)
+5VD: C1.1 C2.1 C4.2 C7.2 D2.2 D4.2 K1.A1 LCD1.2 LCD1.15 P1.2 P2.1 R1.2 R3.1 R4.1 U1.11 U1.32 U2.1 | length 283.6
  Top Layer w1: P2.1 13.83,20.31 C1.1@20.31,20.31 ; R4.1 29.21,10.16 29.21,12.7 21.59,20.32 20.34,20.32 C1.1 C1.1@20.31,20.31 ; LCD1.2 40.64,45.857 41.91,47.127 C7.2 39.37,53.34 R3.1 38.023,53.417 37.063,53.417 D4.2 26.98,56.19 21.61,50.82 K1.A1 16.51,45.8 U2.1 16.51,24.11 C1.1@20.31,20.31 ; U1.11 67.31,68.58 72.39,63.5 U1.32 72.39,57.015 73.66,55.745 C4.2 LCD1.15 ; C2.1 101.62,64.75 109.2,64.75 P1.2
  Bottom Layer w1: C1.1 24.13,24.11 24.13,24.13 31.75,31.75 67.31,31.75 73.66,38.1 LCD1.15 ; R1.2 71.12,76.308 71.43,76.618 D2.2 73.97,83.82 99.06,83.82 101.6,81.28 C2.1 97.368,60.498 97.368,59.757 90.951,53.34 C4.2 ; U1.32@72.39,57.015 U1.32
\M\C\L\R/VPP: D1.2 P1.1 U1.1 | length 21.2
  Top Layer w0.5: U1.1 93.21,72.89 93.21,73.2 D1.2 103.18,67.31 P1.1
BT_AJUSTE: S3.1 U1.34 | length 57.1
  Top Layer w0.254: U1.34 80.01,54.61 80.01,8.31 S3.1@87.249,8.31
BT_SELECT: S2.1 U1.33 | length 66.6
  Top Layer w0.254: S2.1@49.911,8.31 57.15,8.31 78.74,29.9 78.74,53.34 U1.33
GND: C1.2 C2.2 C4.1 C5.2 C7.1 C8.1 C9.1 LCD1.1 LCD1.5 LCD1.7 LCD1.8 LCD1.9 LCD1.10 LCD1.16 P1.3 P2.2 P2.3 P4.2 Q1.3 R4.2 S1.2 S2.2 S3.2 U1.12 U1.31 U2.3 | length 444.1
  Top Layer w1: P2.2 7.62,20.07 9.987,17.703 9.987,15.953 P2.3 17.84,15.32 C1.2 20.32,17.78 25.4,12.7 25.4,8.89 30.48,3.81 33.02,3.81 R4.2 38.1,3.81 49.911,3.81 57.15,3.81 80.01,3.81 S3.2@87.249,3.81 ; v1(25.4,20.32) 25.4,49.53 27.94,52.07 31.723,52.07 32.993,50.8 C7.1 36.83,46.99 LCD1.1 ; Q1.3 39.37,76.7 39.87,76.7 46.99,83.82 50.8,83.82 C9.1 C8.1 71.12,83.82 82.53,83.82 C5.2 87.63,78.74 92.71,83.82 96.52,83.82 99.06,81.28 99.06,79.43 S1.2@106.299,79.43 ; U1.12 64.77,67.31 69.85,62.23 U1.31 69.85,57.015 68.58,55.745 C4.1 ; LCD1.16 76.2,50.689 v1(76.28,50.769) ; C2.2 P1.3
  Bottom Layer w0.254: LCD1.1 39.37,44.45 46.99,44.45 LCD1.5 49.341,44.639 51.248,44.639 52.205,45.596 53.216,45.596 LCD1.7 LCD1.8 LCD1.9 LCD1.10
  Bottom Layer w1: P4.2 5.256,31.75 6.526,33.02 U2.3 13.97,24.15 C1.2 22.88,17.8 v1(25.4,20.32) 59.69,20.32 76.2,36.83 LCD1.16 ; C4.1 71.12,50.8 92.71,50.8 101.6,59.69 C2.2 104.14,62.23 105.41,63.5 105.41,68.58 109.22,72.39 109.22,76.509 S1.2@106.299,79.43 ; U1.31@69.85,57.015 U1.31
LCD_D4: LCD1.11 U1.27 | length 13
  Top Layer w0.254: U1.27 59.69,49.53 LCD1.11
LCD_D5: LCD1.12 U1.28 | length 13
  Top Layer w0.254: U1.28 62.23,49.53 LCD1.12
LCD_D6: LCD1.13 U1.29 | length 13
  Top Layer w0.254: U1.29 64.77,49.53 LCD1.13
LCD_D7: LCD1.14 U1.30 | length 13
  Top Layer w0.254: U1.30 67.31,49.53 LCD1.14
LCD_E: LCD1.6 U1.22 | length 13
  Top Layer w0.254: U1.22 46.99,49.53 LCD1.6
LCD_RS: LCD1.4 U1.21 | length 12
  Top Layer w0.254: U1.21 44.45,46.99 LCD1.4
NetC5_1: C5.1 D1.1 D2.1 R1.1 S1.1 | length 38.9
  Top Layer w1: D2.1 78.45,81.26 78.45,79.03 R1.1 81.29,76.21 87.62,76.21 C5.1 89.23,76.22 D1.1 95.25,78.74 99.06,74.93 S1.1@106.299,74.93
NetC8_2: C8.2 U1.13 Y1.2 | length 9.5
  Top Layer w0.254: U1.13 62.23,75.13 Y1.2 C8.2
NetC9_2: C9.2 U1.14 Y1.1 | length 9.4
  Top Layer w0.254: C9.2 Y1.1 59.69,74.93 U1.14
NetD3_1: D3.1 R3.2 | length 6.4
  Top Layer w0.254: R3.2 D3.1
NetD3_2: D3.2 D4.1 K1.A2 Q1.1 | length 39.4
  Top Layer w1: K1.A2 19.07,50.82 31.44,63.19 D4.1 34.29,68.58 D3.2 35.56,74.43 36.83,75.7 Q1.1
NetK1_1: K1.1 P3.1 | length 22.7
  Bottom Layer w1.676: P3.1 10.16,77.47 10.16,74.93 13.97,71.12 14.03,71.12 K1.1@21.53,71.12
NetK1_4: K1.4 P3.2 | length 14.4
  Bottom Layer w1.6: K1.4@14.03,76.16 21.53,76.16 21.53,81.326 20.32,82.536 P3.2
NetLCD1_3: LCD1.3 R4.3 | length 41.5
  Top Layer w0.254: R4.3 43.18,11.43 LCD1.3
NetQ1_2: Q1.2 R2.1 | length 5.1
  Top Layer w0.254: Q1.2 R2.1
NIVEL_CRITICO: P4.1 U1.37 | length 93.7
  Bottom Layer w0.254: P4.1 16.453,36.83 43.123,63.5 78.74,63.5 U1.37
PGC: P1.5 U1.39 | length 19.9
  Top Layer w0.254: U1.39 91.247,56.073 100.021,56.073 101.098,57.15 P1.5
PGD: P1.4 U1.40 | length 17.6
  Top Layer w0.254: U1.40 95.25,59.69 P1.4
PGM: P1.6 U1.36 | length 27.7
  Top Layer w0.254: U1.36 85.09,54.61 P1.6
RELE: R2.2 U1.15 | length 14.1
  Top Layer w0.254: R2.2 48.26,78.74 52.07,74.93 54.61,74.93 U1.15
TMP_SENSOR: U1.2 U2.2 | length 91.5
  Top Layer w0.254: v1(78.74,62.23) 78.808,62.298 79.233,62.298 89.086,72.152 89.932,72.152 U1.2
  Bottom Layer w0.254: U2.2 15.24,33.52 43.95,62.23 v1(78.74,62.23)
pads on no net: H1.1 H2.1 H3.1 H4.1 K1.2 LCD1.S1 LCD1.S2 LCD1.S3 LCD1.S4 U1.3 U1.4 U1.5 U1.6 U1.7 U1.8 U1.9 U1.10 U1.16 U1.17 U1.18 U1.19 U1.20 U1.23 U1.24 U1.25 U1.26 U1.35 U1.38

## Silkscreen, mask and mechanical layers (free items; w line width, h text height)
Mechanical 1:
  the board outline again, w0.254

## Text inside footprints (layer, text, board x,y; h text height)
C1: Top Overlay "+" at 19.57,23.6 h1.5 r270
C2: Top Overlay "+" at 100.85,68.03 h1.5 r270
C5: Top Overlay "+" at 88.38,72.92 h1.5 r90
LCD1: Top Overlay "LCD 16x2" at 60.718,29.974 h2.54
P1: Top Overlay "1" at 108.712,69.596 h1 r270
Q1: Top Overlay "1" at 36.347,73.99 h1 r270
U2: Top Overlay "3" at 14.773,35.441 h1.5 r90; Top Overlay "1" at 17.219,35.441 h1.5 r90